# EAGLE board trashotron-driver-v1 (EAGLE 9.6.2)
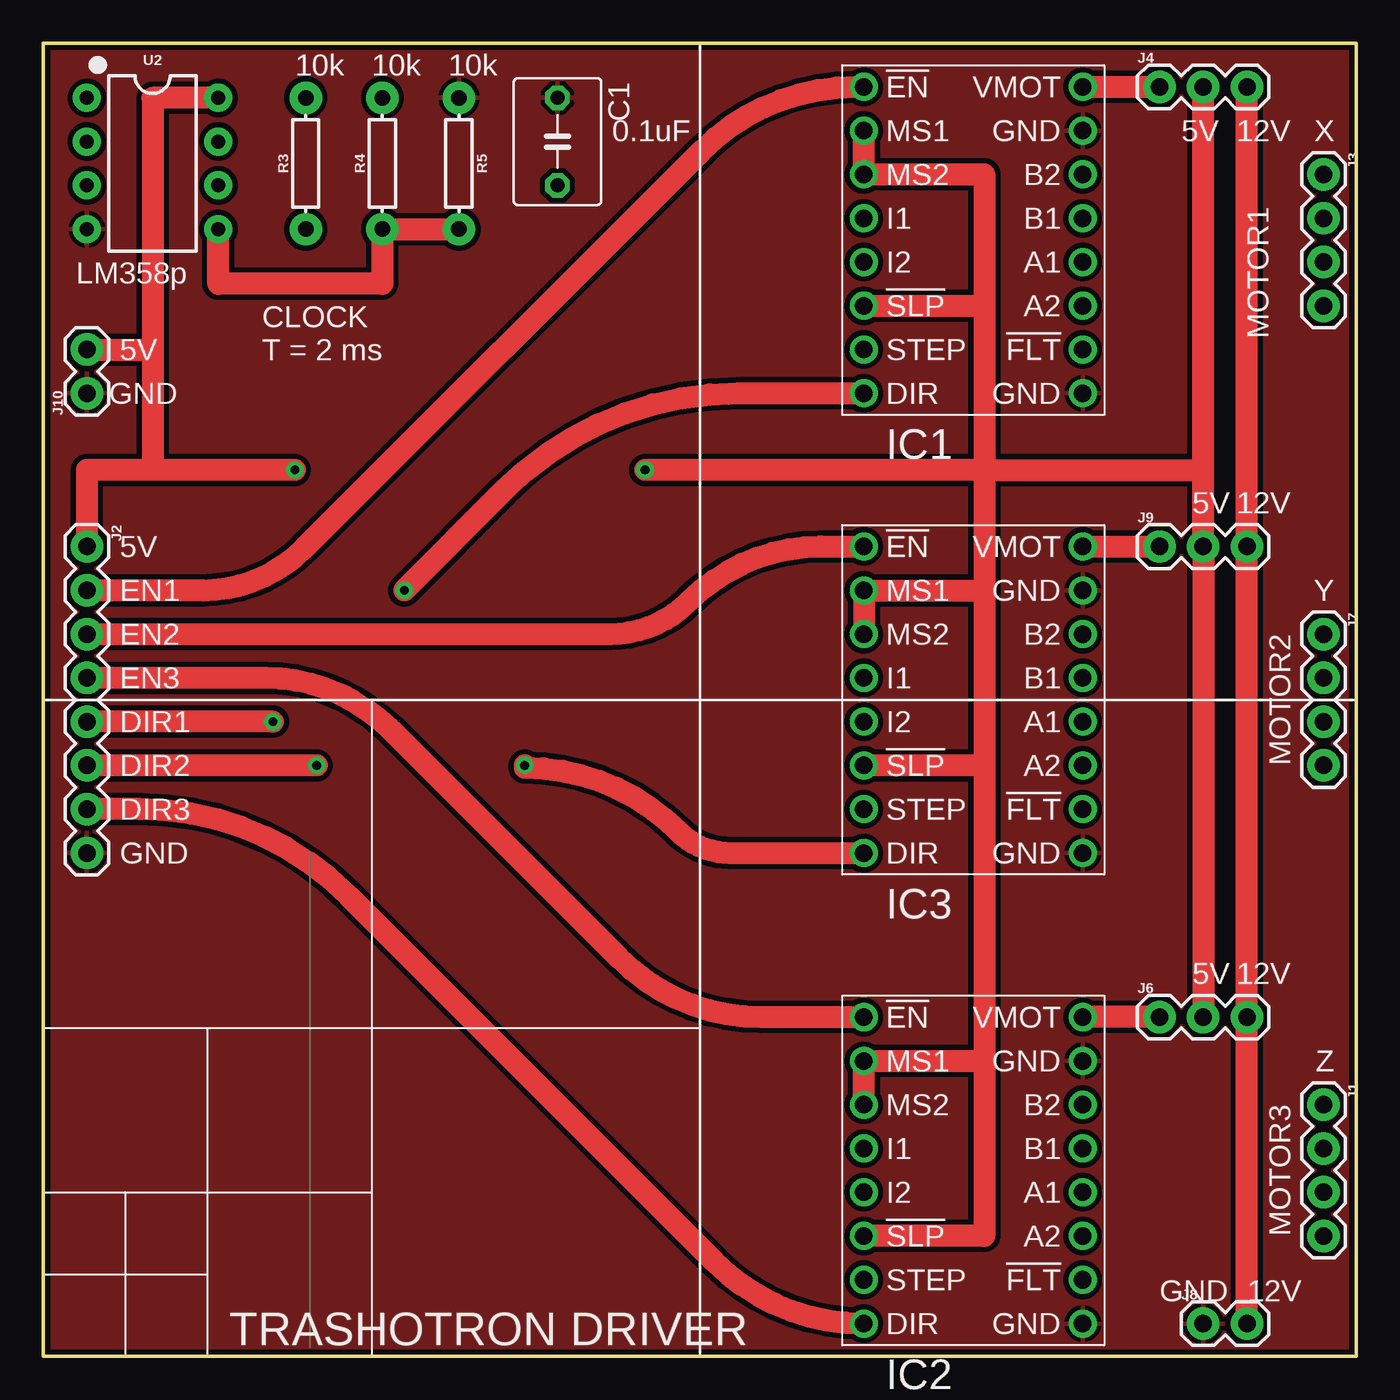
[diagram p0: board, top side]
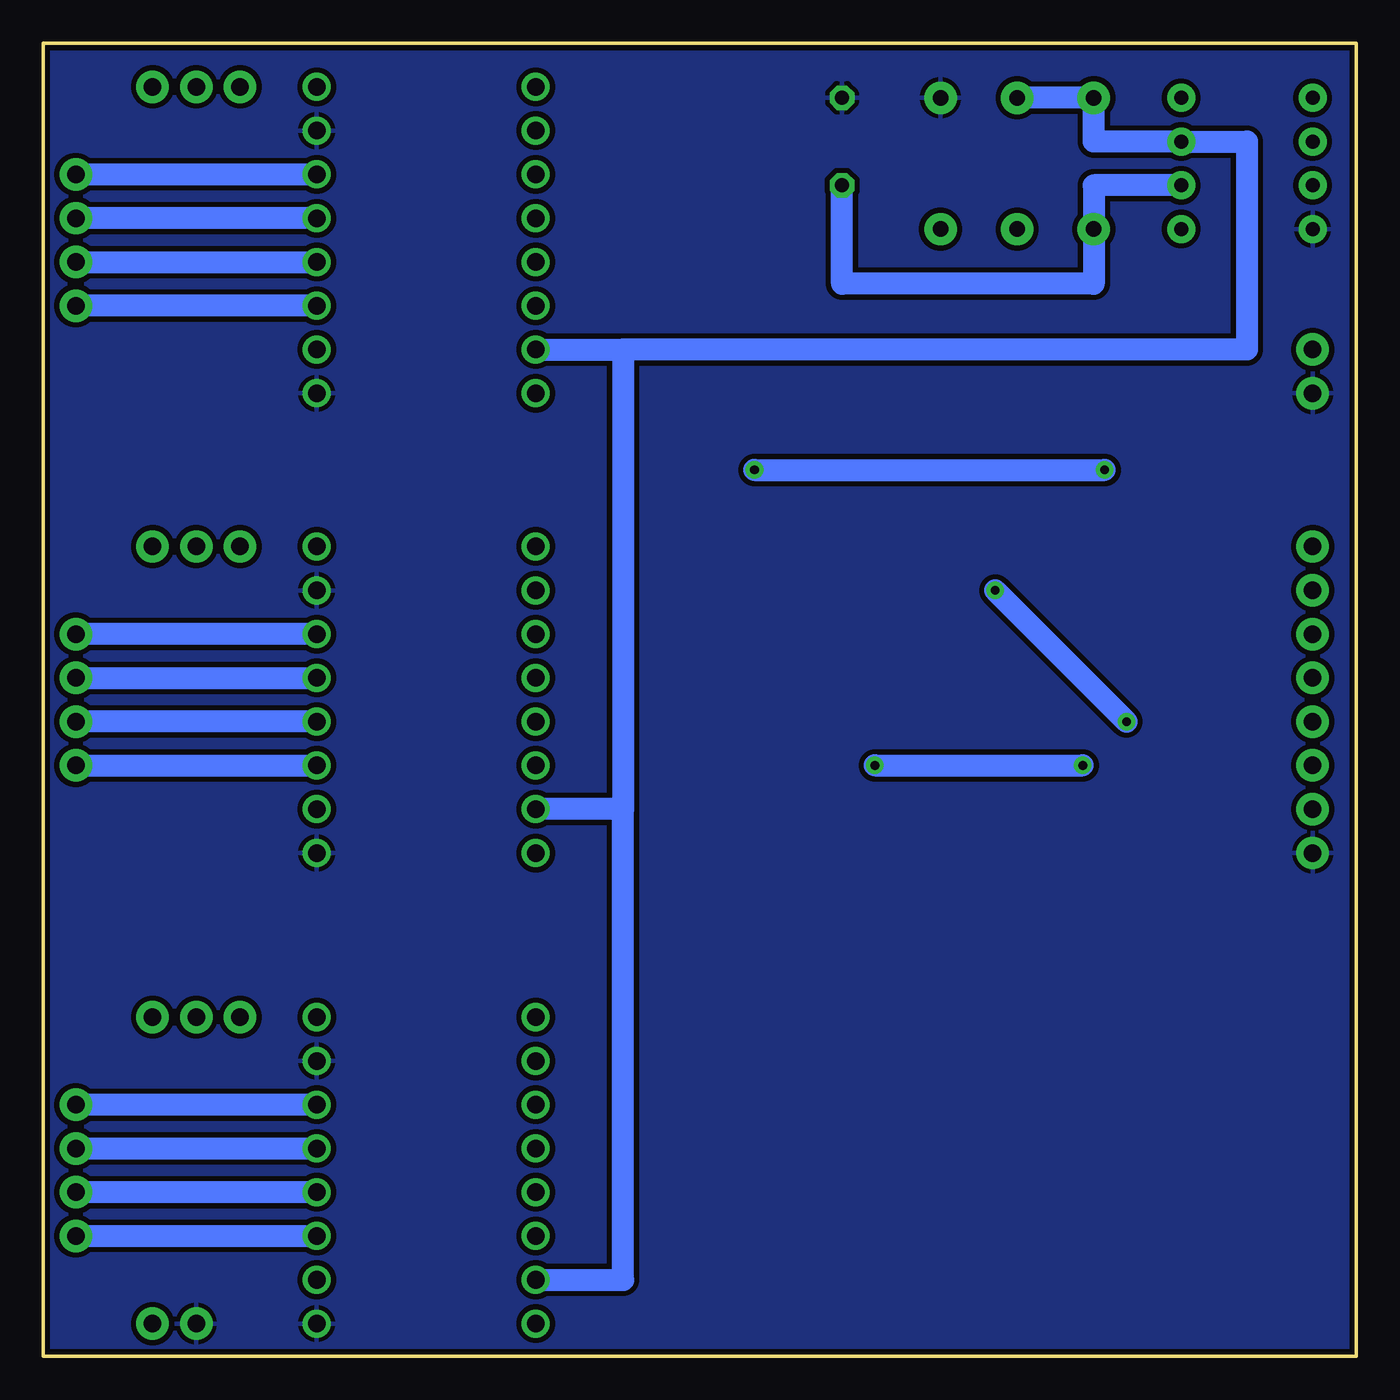
[diagram p1: board, bottom side, seen from below]

Size 76.2 x 76.2 mm. Coordinates in mm from the lower left corner, seen from the top.
Outline: 76.2,0 76.2,76.2 0,76.2 0,0 76.2,0
Copper layers (1*16): Top 0.035mm / dielectric 1.5mm / Bottom 0.035mm
Design rules "default": minimum track width 8mil, minimum drill 20mil, track to track 8mil, track to pad 8mil, pad to pad 8mil, via to via 8mil, smd to smd 8mil, copper to edge 10mil, drill to drill 8mil, minimum pad ring 12mil, minimum via ring 10mil, stop-mask expansion 4mil, vias tented up to drill 25mil, thermal gap 10mil
Net classes: 0 default: width 0.203 mm; 1 vcc: width 0.178 mm

## Footprints (pad centres in the part's own frame; a part is rotated, then mirrored left to right if it is on the bottom)
C050-050X075 = drill 0.813 octagon: 1 -2.54,0; 2 2.54,0
MP6500 = drill 1.016: 1 -6.35,8.89; 2 -6.35,6.35; 3 -6.35,3.81; 4 -6.35,1.27; 5 -6.35,-1.27; 6 -6.35,-3.81; 7 -6.35,-6.35; 8 -6.35,-8.89; 9 6.35,-8.89; 10 6.35,-6.35; 11 6.35,-3.81; 12 6.35,-1.27; 13 6.35,1.27; 14 6.35,3.81; 15 6.35,6.35; 16 6.35,8.89
1X04 = drill 1.016 pad 1.88: 1 0,0; 2 2.54,0; 3 5.08,0; 4 7.62,0
1X08 = drill 1.016 pad 1.88: 1 0,0; 2 2.54,0; 3 5.08,0; 4 7.62,0; 5 10.16,0; 6 12.7,0; 7 15.24,0; 8 17.78,0
1X03 = drill 1.016 pad 1.88: 1 0,0; 2 2.54,0; 3 5.08,0
1X02 = drill 1.016 pad 1.88: 1 0,0; 2 2.54,0
AXIAL-0.3 = drill 0.9 pad 1.88: P$1 -3.81,0; P$2 3.81,0
DIP08 = drill 0.813 pad 1.626: 1 -3.81,-3.81; 2 -1.27,-3.81; 3 1.27,-3.81; 4 3.81,-3.81; 5 3.81,3.81; 6 1.27,3.81; 7 -1.27,3.81; 8 -3.81,3.81

## Placement (x,y rotation side)
C1  [C050-050X075]  29.84,70.48 270 top
IC1  2967-MP6500  [MP6500]  53.98,64.77 0 top
IC2  2967-MP6500  [MP6500]  53.98,10.79 0 top
IC3  2967-MP6500  [MP6500]  53.98,38.1 0 top
J1  [1X04]  74.3,14.61 270 top
J2  [1X08]  2.54,46.99 270 top
J3  [1X04]  74.3,68.58 270 top
J4  455-1750-1-ND  [1X03]  64.77,73.66 0 top
J6  455-1750-1-ND  [1X03]  64.77,19.68 0 top
J7  [1X04]  74.3,41.91 270 top
J8  [1X02]  67.31,1.91 0 top
J9  455-1750-1-ND  [1X03]  64.77,46.99 0 top
J10  [1X02]  2.54,55.88 90 top
R3  [AXIAL-0.3]  15.24,69.22 90 top
R4  [AXIAL-0.3]  19.68,69.22 90 top
R5  [AXIAL-0.3]  24.13,69.22 270 top
U2  LM358  [DIP08]  6.35,69.22 270 top

## Library data of the parts
C1 = rcl; SPICEPREFIX: C
IC1-IC3 = pololu-stepper-driver
J1 J3 J7 = SparkFun-Connectors; PROD_ID: CONN-09696
J2 = SparkFun-Connectors; PROD_ID: CONN-08438
J4 J6 J9 = SparkFun-Connectors; PROD_ID: XXX-00000
J8 J10 = SparkFun-Connectors
R3-R5 = SparkFun-Resistors
U2 = SparkFun-IC-Amplifiers; PROD_ID: IC-09172

## Nets
5V: IC1.2 IC1.3 IC1.6 IC2.2 IC2.3 IC2.6 IC3.2 IC3.3 IC3.6 J2.1 J4.2 J6.2 J9.2 J10.2 U2.8
CLOCK: IC1.7 IC2.7 IC3.7 R3.P$2 R4.P$2 U2.7
DIR1: IC1.8 J2.5
DIR2: IC3.8 J2.6
DIR3: IC2.8 J2.7
EN1: IC1.1 J2.2
EN2: IC3.1 J2.3
EN3: IC2.1 J2.4
EXTPOW: J4.3 J6.3 J8.2 J9.3
GND [vcc]: C1.1 IC1.9 IC1.15 IC2.9 IC2.15 IC3.9 IC3.15 J2.8 J8.1 J10.1 R5.P$1 U2.4
N$1: IC3.14 J7.1
N$4: IC3.13 J7.2
N$5: IC1.14 J3.1
N$6: IC1.13 J3.2
N$7: IC1.12 J3.3
N$8: IC1.11 J3.4
N$9: IC2.14 J1.1
N$10: IC2.13 J1.2
N$11: IC2.12 J1.3
N$12: IC2.11 J1.4
N$13: IC3.12 J7.3
N$14: IC3.11 J7.4
N$18: C1.2 R3.P$1 U2.6
N$19: R4.P$1 R5.P$2 U2.5
VMOT1: IC1.16 J4.1
VMOT2: IC3.16 J9.1
VMOT3: IC2.16 J6.1

## Tracks (layer width: path | path; a pad name or v marks a point on that pad's centre or on a via)
5V  (via drill 0.51)
  Top 1.27: 67.31,51.44 J4.2 | IC1.2 IC1.3 54.61,68.58 54.61,60.96 | IC1.6 54.61,60.96 | 54.61,60.96 54.61,51.44 | 54.61,51.44 54.61,44.45 | 54.61,44.45 IC3.2 IC3.3 | 54.61,51.44 67.31,51.44 | 54.61,44.45 54.61,34.29 | 54.61,34.29 IC3.6 | 54.61,34.29 54.61,17.14 | 54.61,17.14 54.61,6.99 IC2.6 | IC2.3 IC2.2 54.61,17.14 | 67.31,51.44 J9.2 J6.2 | v14.61,51.44 6.35,51.44 | 6.35,51.44 2.54,51.44 J2.1 | 54.61,51.44 v34.92,51.44 | U2.8 6.35,73.03 6.35,58.42 | 6.35,58.42 6.35,51.44 | J10.2 6.35,58.42
  Bottom 1.27: v34.92,51.44 v14.61,51.44
CLOCK
  Bottom 1.27: IC2.7 42.55,4.45 42.55,31.75 | 42.55,31.75 IC3.7 | IC1.7 42.55,58.42 | 42.55,58.42 42.55,31.75 | R4.P$2 R3.P$2 15.24,70.48 U2.7 6.35,70.48 6.35,58.42 42.55,58.42
DIR1  (via drill 0.51)
  Top 1.27: v20.95,44.45 26.76,50.26 arc-45 40.34,55.88 IC1.8 | v13.34,36.83 J2.5
  Bottom 1.27: v20.95,44.45 v13.34,36.83
DIR2  (via drill 0.51)
  Top 1.27: v27.94,34.29 27.94,34.16 arc-45 36.83,30.48 arc45 39.9,29.21 IC3.8 | v15.88,34.29 J2.6
  Bottom 1.27: v27.94,34.29 v15.88,34.29
DIR3
  Top 1.27: IC2.8 arc-45 38.95,5.5 17.69,26.76 arc45 5.64,31.75 J2.7
EN1
  Top 1.27: J2.2 9.24,44.45 arc45 15.15,46.9 38.19,69.94 arc-45 47.17,73.66 IC1.1
EN2
  Top 1.27: IC3.1 45.13,46.99 arc45 37.47,43.81 arc-45 32.87,41.91 J2.3
EN3
  Top 1.27: IC2.1 41.72,19.68 arc-45 33.37,23.14 20.15,36.36 arc45 12.89,39.37 J2.4
EXTPOW
  Top 1.27: J8.2 J6.3 J9.3 J4.3
GND
  pour Top (isolate 0.305): 76.2,0 0,0 0,76.2 76.2,76.2
  pour Bottom (isolate 0.305): 76.2,0 0,0 0,76.2 76.2,76.2
N$1
  Bottom 1.27: IC3.14 J7.1
N$4
  Bottom 1.27: J7.2 IC3.13
N$5
  Bottom 1.27: J3.1 IC1.14
N$6
  Bottom 1.27: IC1.13 J3.2
N$7
  Bottom 1.27: J3.3 IC1.12
N$8
  Bottom 1.27: IC1.11 J3.4
N$9
  Bottom 1.27: IC2.14 J1.1
N$10
  Bottom 1.27: J1.2 IC2.13
N$11
  Bottom 1.27: IC2.12 J1.3
N$12
  Bottom 1.27: J1.4 IC2.11
N$13
  Bottom 1.27: IC3.12 J7.3
N$14
  Bottom 1.27: J7.4 IC3.11
N$18
  Bottom 1.27: U2.6 15.24,67.94 R3.P$1 15.24,62.23 29.84,62.23 C1.2
N$19
  Top 1.27: R5.P$2 R4.P$1 19.68,62.23 10.16,62.23 U2.5
VMOT1
  Top 1.27: IC1.16 J4.1
VMOT2
  Top 1.27: IC3.16 J9.1
VMOT3
  Top 1.27: J6.1 IC2.16

## Text on the board
tPlace: 10k | 10k | 10k | X | 0.1uF | 5V | 12V | LM358p | MOTOR1 | 5V | CLOCK / T = 2 ms | GND | 5V | 12V | 5V | Y | EN1 | EN2 | EN3 | DIR1 | DIR2 | MOTOR2 | DIR3 | GND | 5V | 12V | Z | MOTOR3 | GND | 12V | TRASHOTRON DRIVER
tValues: Tent Vias! | Arduino Wee v1.3